# Altium PCB PCB1.PcbDoc
Units mil, origin at the board's own origin, x right, y up, seen from the top; angles counter-clockwise.
Board outline 1692.91 x 590.55 mil, 4 copper layers (Top Layer, Int1 (GND), Int2 (PWR), Bottom Layer), stack 19.827 mil thick; 78 components, 47 nets, 235 pads, 385 vias.
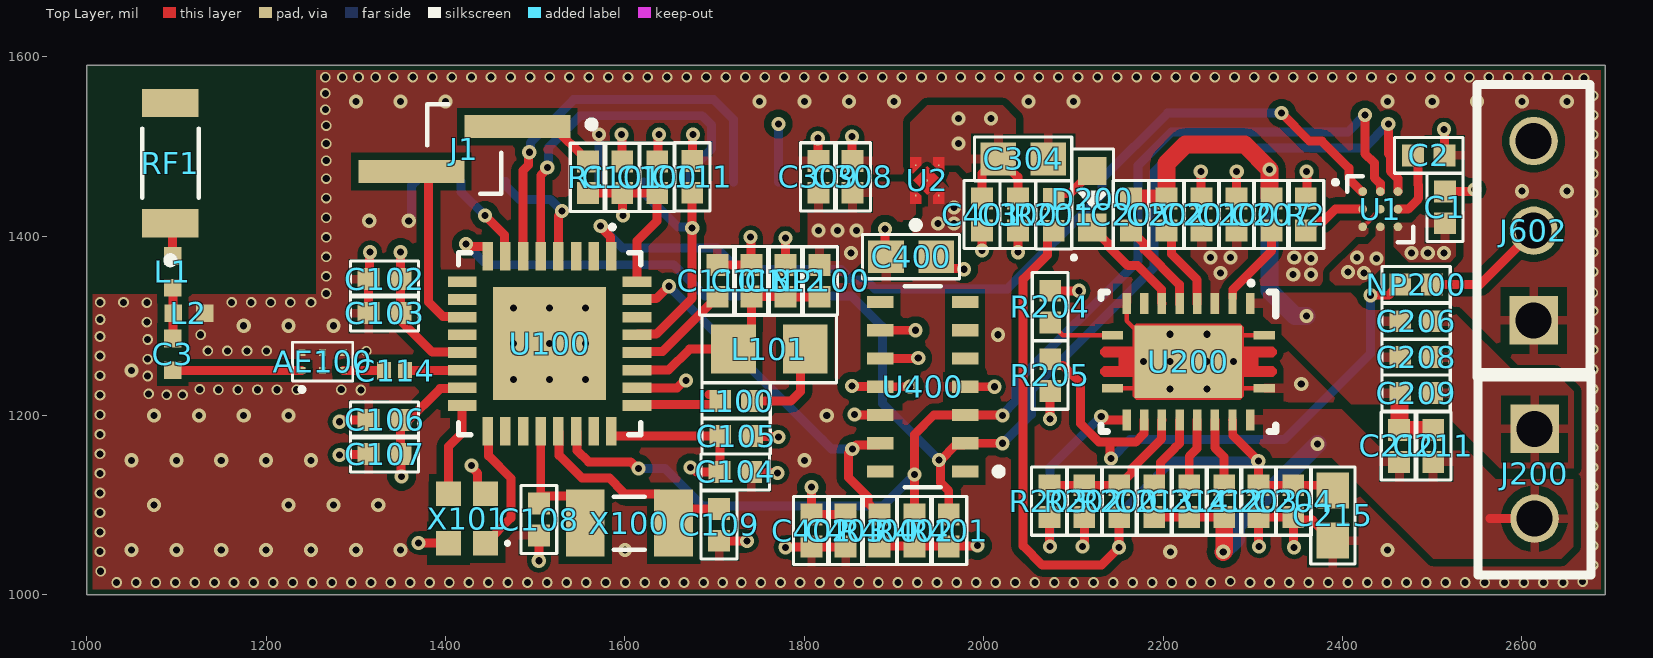
[diagram p0: Top Layer view]
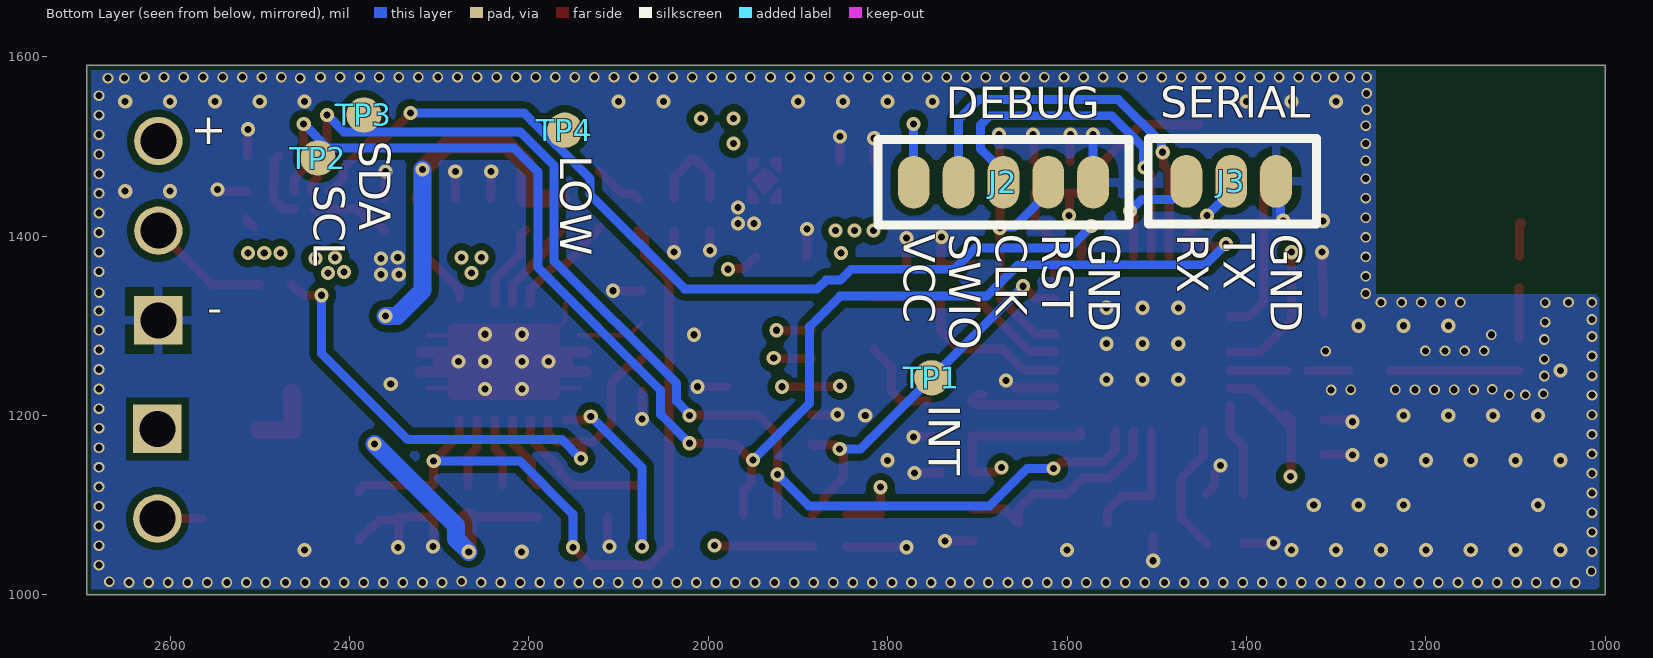
[diagram p1: Bottom Layer view, seen from below]
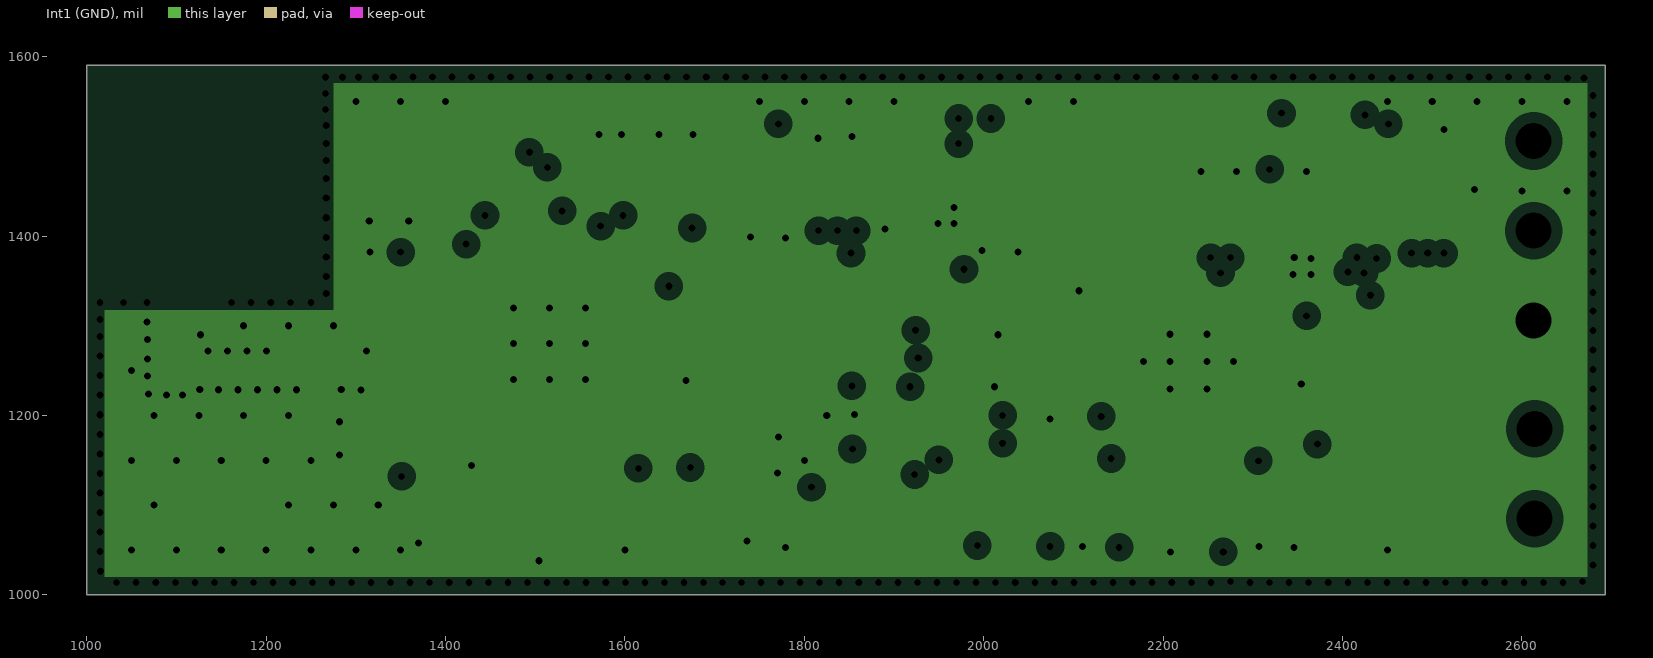
[diagram p2: Int1 (GND), clearances drawn from the general rule]
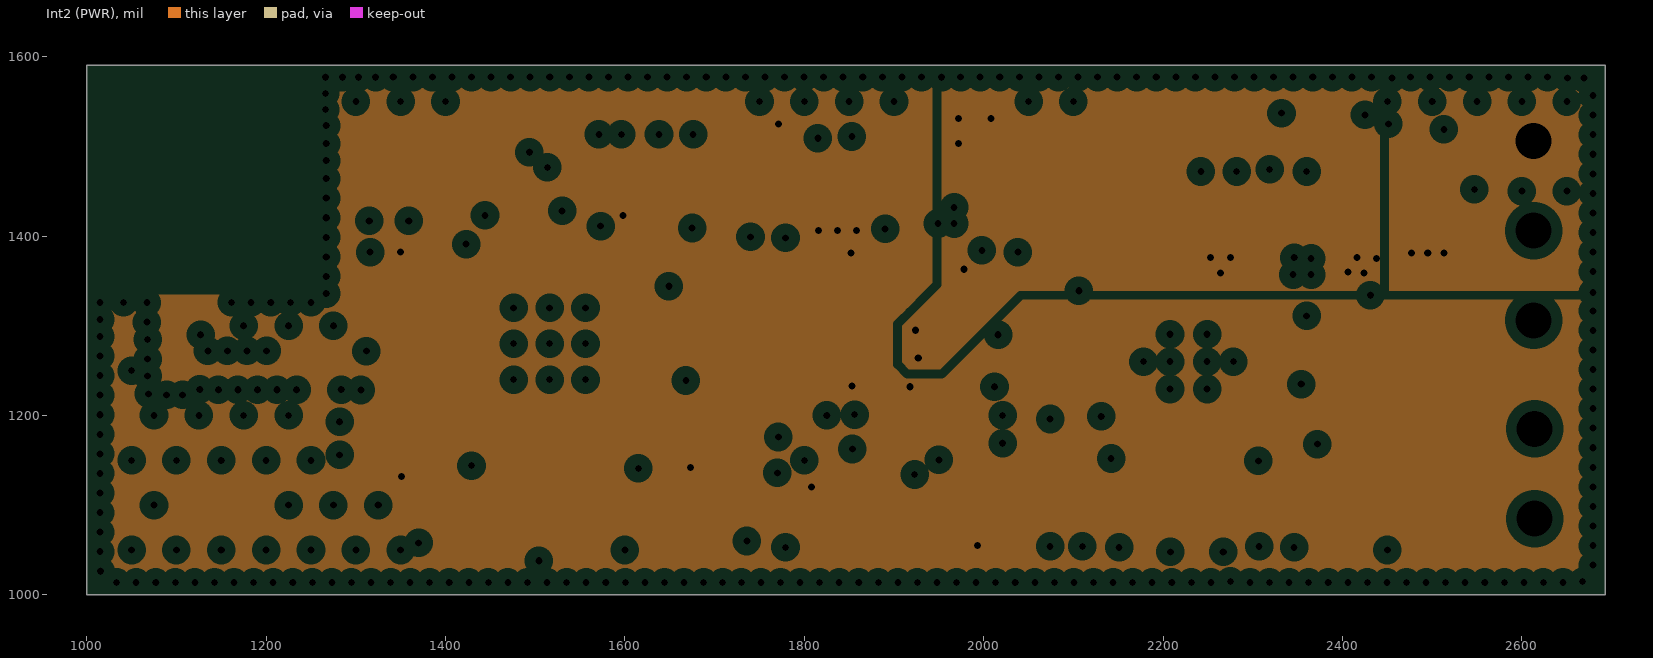
[diagram p3: Int2 (PWR), clearances drawn from the general rule]
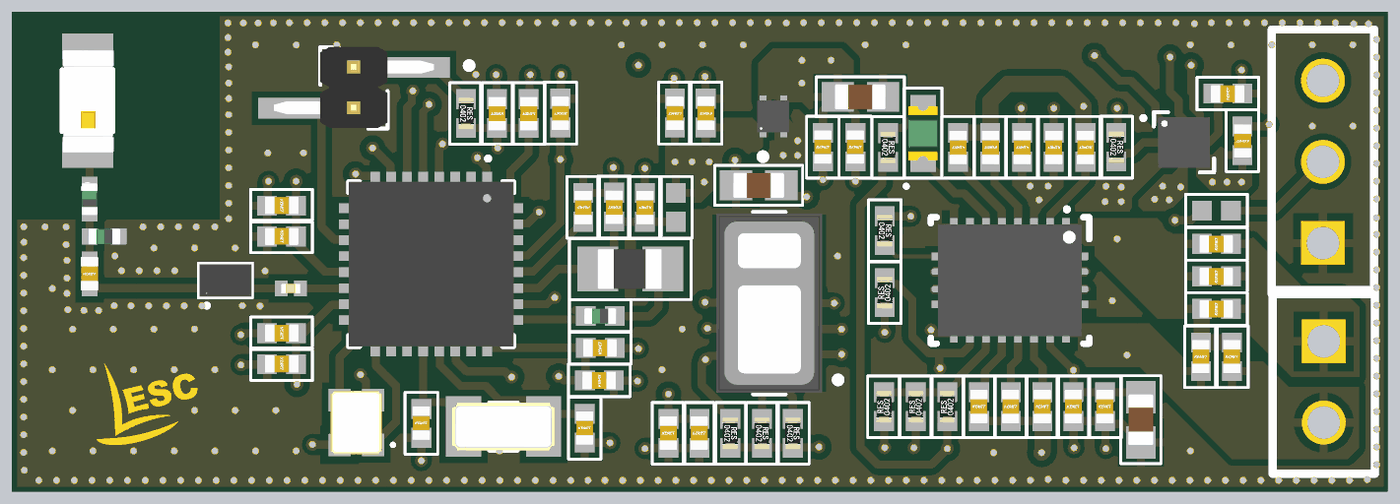
[diagram p4: 3D render of the assembled board from above, using the file's embedded part models]

## Layer stack, top to bottom
Top Solder: solder mask 1, SM-001, Dk 4
Top Layer: signal copper 1.378
Dielectric 2: prepreg 3, PP-007, Dk 4.2
Int1 (GND): plane copper 1.378, net GND
Dielectric 3: core 8.315, Core-039, Dk 4.8
Int2 (PWR): plane copper 1.378, net (Multiple Nets)
Dielectric 4: prepreg 3, PP-007, Dk 4.2
Bottom Layer: signal copper 1.378
Bottom Solder: solder mask 1, SM-001, Dk 4

## Board outline
1000,1000 1000,1590.55 2692.91,1590.55 2692.91,1000

## Design rules (kind name [scope] priority, off if disabled: settings)
Clearance Clearance_1 [WithinRoom('BGA') or WithinRoom('LDO')] p1: gap=5 ignorepadtopadclearanceinfootprint=FALSE
Clearance [All] p2: gap=7.87 ignorepadtopadclearanceinfootprint=FALSE
ComponentClearance [All] p1: gap=7.87 collisioncheckmode=3 verticalgap=7.87 showdistances=FALSE
PlaneClearance [All] p1: clearance=12
PlaneConnect [All] p1: pad.planeconnectstyle=Relief pad.reliefexpansion=20 pad.reliefentries=4 pad.reliefconductorwidth=10 pad.reliefairgap=10 via.planeconnectstyle=Direct via.reliefexpansion=20 via.reliefentries=4 via.reliefconductorwidth=10 via.reliefairgap=10
PolygonConnect [All] p1: thpad.connectstyle=Relief thpad.reliefconductorwidth=10 thpad.reliefentries=4 thpad.polygonreliefangle="90 Angle" thpad.airgapwidth=10 smdpad.connectstyle=Relief smdpad.reliefconductorwidth=10 smdpad.reliefentries=4 smdpad.polygonreliefangle="90 Angle" smdpad.airgapwidth=10 via.connectstyle=Direct via.reliefconductorwidth=10 via.reliefentries=4 via.polygonreliefangle="90 Angle" via.airgapwidth=10
RoomDefinition LDO [False] p1: confinementstyle=ConfineIn formatcopy=TRUE lockcomponents=FALSE outline 1918.1,1436.02 1918.1,1487.98 1955.9,1487.98 1955.9,1436.02
RoomDefinition BGA [False] p2: confinementstyle=ConfineIn formatcopy=TRUE lockcomponents=FALSE outline 2475,1398 2475,1464 2407,1464 2407,1398
RoutingVias [All] p1: holewidth=15.75 width=23.62 viastyle="Through Hole" minholewidth=7.87 minwidth=15.75 maxholewidth=19.68 maxwidth=27.56
SolderMaskExpansion SolderMaskExpansion_1 [ViaSize>0] p1: expansion=4 istentingtop=TRUE
SolderMaskExpansion [All] p2: expansion=0 istentingtop=FALSE
SupplyNets "Schematic Supply Nets_4" [InNet('VBAT')] p1: voltage=0.000
SupplyNets "Schematic Supply Nets_3" [InNet('VSYS')] p2: voltage=0.000
SupplyNets "Schematic Supply Nets_1" [InNet('1V8')] p3: voltage=0.000
SupplyNets "Schematic Supply Nets" [InNet('GND')] p4: voltage=0.000
Width [All] p1: maxlimit=20 minlimit=5 preferedwidth=10 minimp=50.000000 maximp=50.000000 favimp=50.000000
27 further rules are at their usual default settings.

## Classes and differential pairs
component class "05 - CONNECTOR": J2 J3 J602
component class "04 - OXIMETER": C400 C401 C402 C403 R400 R401 R402 TP1 TP2 TP3 U400
component class "03 - POWER SUPLY": C1 C2 C300 C304 C308 C309 R2 TP4 U1 U2
component class "02 - WIRELESS_CHARGE": C200 C201 C202 C203 C204 C205 C206 C207 C208 C209 C210 C211 C212 C213 C214 C215 D200 J200 NP200 R200 R201 R202 R203 R204 R205 U200
component class "01 - MCU": AE100 C3 C100 C101 C102 C103 C104 C105 C106 C107 C108 C109 C110 C111 C112 C113 C114 J1 L1 L2 L100 L101 NP100 R1 RF1 U100 X100 X101

## Components (designator, comment, footprint, x,y, rotation, side; value= is the part's Value field where it differs from the comment)
AE100 "RF FILTER LOW PASS 2.45GHZ 6SMD" MLPF-WB55-01E3_STM 1263,1260 r90 top
C1 "GRM155R61E105KA12D" 0402-C-R 2514.11,1431.96 r270 top value=1uF
C2 "GRM155R61A475MEAAD" 0402-C-R 2496.11,1489.96 r180 top value=4.7uF
C3 "GJM1555C1HR90WB01D" 0402-C-R-RF 1096,1268 r90 top value=1pF
C100 "C0402C104K8RACTU" 0402-C-R 1636,1465.49 r270 top value=100nF
C101 "GRM155R61E105KA12D" 0402-C-R 1597,1465.49 r270 top value=1uF
C102 "C0402C104K8RACTU" 0402-C-R 1332,1352 r0 top value=3pF
C103 "C0402C104K8RACTU" 0402-C-R 1332,1314 r0 top value=100nF
C104 "C0402C104K8RACTU" 0402-C-R 1723,1137 r180 top value=100nF
C105 "GRM155R61A475MEAAD" 0402-C-R 1724,1177 r180 top value=4.7uF
C106 "C0402C104K8RACTU" 0402-C-R 1332,1195 r0 top value=3pF
C107 "C0402C104K8RACTU" 0402-C-R 1332,1157 r0 top value=100nF
C108 "GCM1555C1H120FA16J" 0402-C-R 1504,1084 r90 top value=12pF
C109 "GCM1555C1H120FA16J" 0402-C-R 1705,1078 r90 top value=12pF
C110 "C0402C104K8RACTU" 0402-C-R 1703,1350 r270 top value=0.22uF
C111 "C0402C104K8RACTU" 0402-C-R 1675,1466 r270 top value=100nF
C112 "C0402C104K8RACTU" 0402-C-R 1779,1350 r270 top value=100nF
C113 "GRM155R61A475MEAAD" 0402-C-R 1741,1350.2 r270 top value=4.7uF
C114 "C0402C104K8RACTU" 0201-C-R-RF 1355,1250 r90 top value=20pF
C200 "C0402C104K8RACTU" 0402-C-R 2281.9,1423.96 r270 top value=100nF
C201 "GRM155R61A475MEAAD" 0402-C-R 2242.9,1423.96 r270 top value=4.7uF
C202 "GRM155R61H474KE11D" 0402-C-R 2203.9,1423.96 r270 top value=0.47uF
C203 "GCM155R71H223KA55D" 0402-C-R 2306.11,1104.47 r90 top value=0.022uF
C204 "GRM155R61A475MEAAD" 0402-C-R 2345.11,1104.47 r90 top value=4.7uF
C205 "GCM155R71H223KA55D" 0402-C-R 2164.11,1423.96 r270 top value=0.022uF
C206 "GCM155R71H683KE02D" 0402-C-R 2482.11,1304.96 r180 top value=0.068uF
C207 "GCM155R71H103KA55D" 0402-C-R 2320.9,1423.96 r270 top value=10000pF
C208 "GCM155R71H683KE02D" 0402-C-R 2482.11,1264.96 r180 top value=0.068uF
C209 "GCM155R71H473KE02D" 0402-C-R 2482.11,1224.96 r180 top value=0.047uF
C210 "GRM1555C1H182JA01D" 0402-C-R 2463.11,1165.96 r90 top value=1800pF
C211 "GRM1555C1H101JA01D" 0402-C-R 2501.11,1165.96 r90 top value=100pF
C212 "GCM155R71H103KA55D" 0402-C-R 2268.11,1104.47 r90 top value=10000pF
C213 "GCM155R71H223KA55D" 0402-C-R 2190.11,1104.47 r90 top value=0.022uF
C214 "GRM155R61H474KE11D" 0402-C-R 2229.11,1104.47 r90 top value=0.47uF
C215 "CAP SMD 0603 10uF 10V ±10%" 0603-C-R 2389.11,1088.47 r90 top value=10uF
C300 "C0402C104K8RACTU" 0402-C-R 2038,1424 r90 top value=100nF
C304 "CAP SMD 0603 10uF 10V ±10%" 0603-C-R 2044,1486 r180 top value=10uF
C308 "GRM155R61E105KA12D" 0402-C-R 1853.8,1466 r270 top value=1uF
C309 "C0402C104K8RACTU" 0402-C-R 1815.8,1466 r270 top value=100nF
C400 "CAP SMD 0603 10uF 10V ±10%" 0603-C-R 1919,1377 r0 top value=10uF
C401 "C0402C104K8RACTU" 0402-C-R 1998,1424 r90 top value=100nF
C402 "GRM155R61A475MEAAD" 0402-C-R 1808,1071.72 r90 top value=4.7uF
C403 "C0402C104K8RACTU" 0402-C-R 1846,1071.72 r90 top value=100nF
D200 "150060GS75000" LED0603 2121.11,1440.96 r90 top
J1 "CONN HEADER SMD 2POS 1.27MM" HARWIN_M50-3630242 1421,1497 r270 top
J2 "CONN PCB 5PIN" "SWD CONNECTOR" 1771,1460 r180 bottom
J3 "CONN PCB 3PIN" "DEBUG CONNECTOR" 1467,1461 r180 bottom
J200 "CONN COIL" "CONNECTOR COIL" 2614.11,1184.96 r270 top
J602 "10114830-11103LF" "CONNECTOR BATTERY" 2613.11,1305.96 r90 top
L1 "IND 3.9NH 300MA 170MOHM SM_1" "0402-R-L -RF" 1095.87,1360 r90 top value=3.9nH
L2 "IND 2.7NH 300MA 170MOHM SM" "0402-R-L -RF" 1114,1314 r180 top value=2.7nH
L100 "IND 22NH 350MA 0.58OHM SMD" 0402-R-L 1724,1216 r180 top
L101 "IND 10UH 300MA 680MOHM SMD" 0805-R-L 1761,1274 r0 top
NP100 "NP" 0402-R-NP 1817,1350 r90 top
NP200 "NP" 0402-R-NP 2482.11,1345.96 r0 top
R1 "RMCF0402FT10K0" 0402-R-R 1559,1465.49 r270 top value=10K
R2 "RMCF0402FT20K0" 0402-R-R 2359,1424 r270 top value=20K
R200 "RMCF0402FT20K0" 0402-R-R 2151.11,1104.47 r90 top value=20K
R201 "RMCF0402FT10K0" 0402-R-R 2078.11,1423.68 r270 top value=10K
R202 "RMCF0402JT200R" 0402-R-R 2112.11,1104.47 r90 top value=200R
R203 "RMCF0402FT422R" 0402-R-R 2073.11,1104.47 r90 top value=422R
R204 "RMCF0402FT2K43" 0402-R-R 2074.11,1321.25 r270 top value=2.43K
R205 "RMCF0402FT10K0" 0402-R-R 2074.11,1244.96 r90 top value=10K
R400 "RMCF0402FT1K00" 0402-R-R 1884,1071.72 r270 top value=1K
R401 "RMCF0402FT1K00" 0402-R-R 1961,1071.72 r270 top value=1K
R402 "RMCF0402FT1K00" 0402-R-R 1923,1071.72 r270 top value=1K
RF1 "RF ANT 2.4GHZ CHIP SOLDER SMD" XCVR_2450AT18A0100001E 1093.22,1481.32 r90 top
TP1 "TEST POINT SMD" "TP SMD" 1751,1242 r90 bottom
TP2 "TEST POINT SMD" "TP SMD" 2435,1487 r90 bottom
TP3 "TEST POINT SMD" "TP SMD" 2384,1535 r90 bottom
TP4 "TEST POINT SMD" "TP SMD" 2160,1518 r90 bottom
U1 "IC SINGLE-CELL BATTERY FUEL GAUGE W" IC_BQ27427YZFR 2442.11,1429.96 r0 top locked
U2 "IC REG LINEAR 1.8V 200MA 4-X2SON" IC_TPS7A0218PDQNR 1937,1462 r90 top
U100 "IC ULTRA-LOW-POWER, ARM CORTEX-M0+" VFQFPN-32_5x5x1mm_STM 1516,1280 r270 top locked
U200 "BQ51050BRHLR" RHL0020A 2228.11,1259.96 r270 top locked
U400 "IC SENSOR OXIMETER/HEART RATE I2C" XDCR_MAX30101EFD+ 1932,1232 r180 top
X100 "ECX-.327-CDX-1293" XTAL_ECS-.327-12.5-34RR-TR 1605,1080 r0 top value=32.768kHz
X101 "ECS-320-8-37-CKM-TR3" XTAL_ECS-320-8-37-CKM-TR3 1424,1085 r90 top

## Footprints (in the part's own frame and the unit in brackets; to place one, negate y for a bottom-side part, rotate by r counter-clockwise, add the part's x,y. Pads: shape width x height; smd on the part's side, far side on the other; paste and mask are expansions set on the pad)
0201-C-R-RF [mm]
  rect 0.5x0.4 smd: 1(0,0) 2(0,0.6)
  body extent -0.15,0 0.15,0.6, height 0.3
0402-C-R [mm]
  rect 0.62x0.62 smd: 1(-0.45,0) 2(0.45,0)
  silkscreen extent -0.97,-0.51 0.97,0.51, body extent -0.52,-0.27 0.53,0.28, height 0.55
0402-C-R-RF [mm]
  rect 0.5x0.5 smd: 1(-0.45,0) 2(0.45,0)
  body extent -0.52,-0.27 0.53,0.28, height 0.55
0402-R-L [mm]
  rect 0.62x0.62 smd: 1(-0.45,0) 2(0.45,0)
  silkscreen extent -0.97,-0.51 0.97,0.51, body extent -0.5,-0.25 0.5,0.25, height 0.55
"0402-R-L -RF" [mm]
  rect 0.5x0.5 smd: 1(-0.45,0) 2(0.45,0)
  body extent -0.5,-0.25 0.5,0.25, height 0.55
0402-R-NP [mm]
  rect 0.62x0.62 smd: 1(-0.45,0) 2(0.45,0)
  silkscreen extent -0.97,-0.51 0.97,0.51
0402-R-R [mm]
  rect 0.62x0.62 smd: 1(-0.45,0) 2(0.45,0)
  silkscreen extent -0.97,-0.51 0.97,0.51, body extent -0.5,-0.25 0.5,0.25, height 0.35
0603-C-R [mm]
  rect 1.01x0.93 smd: 1(-0.709,0) 2(0.709,0)
  silkscreen extent -1.38,-0.63 1.38,0.63, body extent -0.8,-0.4 0.8,0.4, height 1
0805-R-L [mil]
  rect 50x55 smd: 1(-40,0) 2(40,0)
  silkscreen extent -75,-38 75,38, body extent -40,-25 39,25, height 49
"CONNECTOR BATTERY" [mm]
  rect 1.37x1.37 hole 1.02: 1(0,0)
  round 1.37 hole 1.02: 2(2.54,0) 3(5.08,0)
  silkscreen extent -1.6,-1.6 6.68,1.6
"CONNECTOR COIL" [mm]
  rect 1.37x1.37 hole 1.02: 1(0,0)
  round 1.37 hole 1.02: 2(2.54,0)
  silkscreen extent -1.6,-1.6 4.14,1.6
"DEBUG CONNECTOR" [mm]
  oval 0.9x1.5 smd: 1(0,0) 2(1.27,0) 3(2.54,0)
  silkscreen extent -1.08,-1.21 3.68,1.21
HARWIN_M50-3630242 [mm]
  rect 0.65x3 smd: 1(-0.635,1.5) 2(0.635,-1.5)
  silkscreen extent -1.27,-1.05 1.27,3.7, body extent -1.29,-2.5 1.25,2.5, height 4.5
IC_BQ27427YZFR [mm]
  round 0.245 smd: A1(-0.5,0.5) A2(0,0.5) A3(0.5,0.5) B1(-0.5,0) B2(0,0) B3(0.5,0) C1(-0.5,-0.5) C2(0,-0.5) C3(0.5,-0.5)
  silkscreen extent -1.33,-0.94 0.94,0.94, body extent -0.81,-0.79 0.81,0.79, height 0.63
IC_TPS7A0218PDQNR [mm]
  rect 0.05x0.05 smd paste-1 mask+0: 1(-0.43,0.325) 2(-0.43,-0.325) 3(0.43,-0.325) 4(0.43,0.325) 5(0,0)
  Top Layer region: -0.2,0.4 -0.43,0.17 -0.66,0.17 -0.66,0.48 -0.2,0.48
  Top Layer region: 0.66,-0.48 0.2,-0.48 0.2,-0.4 0.43,-0.17 0.66,-0.17
  Top Layer region: 0.66,0.17 0.43,0.17 0.2,0.4 0.2,0.48 0.66,0.48
  Top Layer region: -0.2,-0.4 -0.2,-0.48 -0.66,-0.48 -0.66,-0.17 -0.43,-0.17
  Top Layer region: 0.4,0 0,-0.4 -0.4,0 0,0.4
  silkscreen extent -1.36,0.23 -1.16,0.42, body extent -0.5,-0.5 0.5,0.5, height 0.4
LED0603 [mm]
  rect 0.8x0.8 smd: 1(-0.8,0) 2(0.8,0)
  silkscreen extent -1.7,-0.59 1.42,0.59, body extent -0.85,-0.45 0.85,0.45, height 0.9
MLPF-WB55-01E3_STM [mil]
  rect 8x8 smd paste+0 mask+0: 1(-10,23.11) 2(-10,0) 3(-10,-23.11) 4(10,-23.11) 5(10,0) 6(10,23.11)
  silkscreen extent -33,-34 21,34, body extent -20,-32 20,32, height 18
RHL0020A [mm]
  rect 0.24x0.6 smd paste+0: 1(-0.75,2.15) 10(-0.75,-2.15) 11(0.75,-2.15) 20(0.75,2.15)
  rect 0.6x0.24 smd paste+0: 2(-1.65,1.75) 3(-1.65,1.25) 4(-1.65,0.75) 5(-1.65,0.25) 6(-1.65,-0.25) 7(-1.65,-0.75) 8(-1.65,-1.25) 9(-1.65,-1.75) 12(1.65,-1.75) 13(1.65,-1.25) 14(1.65,-0.75) 15(1.65,-0.25) 16(1.65,0.25) 17(1.65,0.75) 18(1.65,1.25) 19(1.65,1.75)
  rect 2.05x3.05 smd paste-1.512 mask+0: 21(0,0)
  Top Layer region: -1.075,-1.475 -0.975,-1.575 -0.425,-1.575 -0.425,-2.4 -0.325,-2.5 -0.225,-2.5 -0.125,-2.4 -0.125,-1.975 0.125,-1.975 0.125,-2.4 0.225,-2.5 0.325,-2.5 0.425,-2.4 0.425,-1.575 0.975,-1.575 1.075,-1.475 1.075,1.475 0.975,1.575 0.425,1.575 0.425,2.4 0.325,2.5 0.225,2.5 0.125,2.4 0.125,1.975 -0.125,1.975 -0.125,2.4 -0.225,2.5 -0.325,2.5 -0.425,2.4 -0.425,1.575 -0.975,1.575 -1.075,1.475
  silkscreen extent -2.29,-2.47 1.98,2.47, body extent -1.75,-2.25 1.75,2.25, height 1
"SWD CONNECTOR" [mm]
  oval 0.9x1.5 smd: 1(0,0) 2(1.27,0) 3(2.54,0) 4(3.81,0) 5(5.08,0)
  silkscreen extent -1.02,-1.21 6.1,1.21
"TP SMD" [mm]
  round 1 smd: 1(0,0)
VFQFPN-32_5x5x1mm_STM [mil]
  rect 32x11.81 smd: 1(-97.5,68.9) 2(-97.5,49.21) 3(-97.5,29.53) 4(-97.5,9.84) 5(-97.5,-9.84) 6(-97.5,-29.53) 7(-97.5,-49.21) 8(-97.5,-68.9) 17(97.5,-68.9) 18(97.5,-49.21) 19(97.5,-29.53) 20(97.5,-9.84) 21(97.5,9.84) 22(97.5,29.53) 23(97.5,49.21) 24(97.5,68.9)
  rect 11.81x32 smd: 9(-68.9,-97.5) 10(-49.21,-97.5) 11(-29.53,-97.5) 12(-9.84,-97.5) 13(9.84,-97.5) 14(29.53,-97.5) 15(49.21,-97.5) 16(68.9,-97.5) 25(68.9,97.5) 26(49.21,97.5) 27(29.53,97.5) 28(9.84,97.5) 29(-9.84,97.5) 30(-29.53,97.5) 31(-49.21,97.5) 32(-68.9,97.5)
  rect 126x126 smd paste-18.45: 33(0,0)
  silkscreen extent -132,-102 102,102, body extent -101,-101 101,101, height 39
XCVR_2450AT18A0100001E [mm]
  rect 0.8x1.6 smd: 1(-1.7,0) 2(1.7,0)
  silkscreen extent -2.85,-0.8 0.98,0.8, body extent -1.62,-0.82 1.58,0.78, height 1.4
XDCR_MAX30101EFD+ [mm]
  rect 0.75x0.35 smd: 1(-1.2,2.4) 2(-1.2,1.6) 3(-1.2,0.8) 4(-1.2,0) 5(-1.2,-0.8) 6(-1.2,-1.6) 7(-1.2,-2.4) 8(1.2,-2.4) 9(1.2,-1.6) 10(1.2,-0.8) 11(1.2,0) 12(1.2,0.8) 13(1.2,1.6) 14(1.2,2.4)
  silkscreen extent -2.25,-2.85 0.51,2.85, body extent -1.65,-2.8 1.65,2.8, height 1.65
XTAL_ECS-320-8-37-CKM-TR3 [mm]
  rect 0.7x0.7 smd: 1(-0.7,-0.525) 2(0.7,-0.525) 3(0.7,0.525) 4(-0.7,0.525)
  silkscreen extent -0.75,-1.19 -0.65,-1.09, body extent -1,-0.8 1,0.8, height 0.55
XTAL_ECS-.327-12.5-34RR-TR [mm]
  rect 1.1x1.9 smd: 1(-1.25,0) 2(1.25,0)
  silkscreen extent -0.44,-0.75 0.44,0.75, body extent -1.6,-0.75 1.6,0.75, height 0.9

## Part data
AE100: "2.45GHz Center Frequency Low Pass RF Filter (Radio Frequency) 100MHz Bandwidth 1.1dB 6-SMD, No Lead PN: MLPF-WB55-01E3", Mfr_Name=STMicroelectronics, PN=MLPF-WB55-01E3, RefDes=RefDes, Type=Type
C1 C101 C308: library part "CAP SMD 0402 1uF 25V ±10%", "CAP SMD 0402 MLCC GERAL 1uF 25V ±10% 0402 X5R PN:GRM155R61E105KA12D MURATA", Tolerance=10%, Voltage=25V, PN=GRM155R61E105KA12D, SIZE=0402
C2 C105 C113 C201 C204 C402: library part "CAP SMD 0402 4.7uF 10V ±20%", "CAP SMD 0402 MLCC GERAL 4.7uF 10V ±20% 0402 X5R PN:GRM155R61A475MEAAD MURATA", Tolerance=20%, Voltage=10V, PN=GRM155R61A475MEAAD, SIZE=0402
C3: library part "CAP SMD 1PF 50V C0G/NP0 0402", "CAP CER 1PF 50V C0G/NP0 0402 PN: QSCF500Q1R0B1GV001T", Tolerance=20%, Voltage=50V, PN=QSCF500Q1R0B1GV001T, SIZE=0402
C100 C103 C104 C107 C111 C112 C200 C300 C309 C401 C403: library part "CAP SMD 0402 100nF 10V ±20%", "CAP SMD 0402 MLCC GERAL 100nF 10V ±20% 0402 X7R PN:C0402C104K8RACTU KEMET", Tolerance=20%, Voltage=10V, PN=C0402C104K8RACTU, SIZE=0402
C102 C106: library part "CAP SMD 0402 3pF 50V ±0.1pF", "CAP CER 3PF 50V C0G/NP0 0402 PN: 0402N3R0B500CT", Tolerance=±0.1pF, Voltage=50V, PN=0402N3R0B500CT, SIZE=0402
C108 C109: library part "CAP SMD 0402 12pF 50V ±1%", "CAP SMD CER 12pF 50V ±1% 0402 C0G,NP0 TAPE PN: GCM1555C1H120FA16J", POWER=50V, Tolerance=1%, PN=GCM1555C1H120FA16J
C110: library part "CAP SMD 0402 0.22uF 6.3V ±10%", "CAP SMD 0402 MLCC GERAL 0.22u 6.3V ±10% 0402 X5R PN: CC0402KRX5R5BB224", Tolerance=10%, Voltage=6.3V, PN=CC0402KRX5R5BB224, SIZE=0402
C114: library part "CAP SMD 0201 20pF 25V ±2%", "20 pF ±2% 25V Ceramic Capacitor C0G, NP0 0201 PN: GJM0335C1E200GB01D", Tolerance=2%, Voltage=25V, PN=GJM0335C1E200GB01D, SIZE=0201
C202 C214: library part "CAP SMD 0402 0.47uF 50V ±10%", "CAP CER  0.47uF 50V X7R 0402 PN: GRM155R61H474KE11D", POWER=50V, Tolerance=10%, PN=GRM155R61H474KE11D
C203 C205 C213: library part "CAP SMD 0402 0.022uF 50V ±10%", "CAP CER  0.022uF 50V X7R 0402 PN: GCM155R71H223KA55D", POWER=50V, Tolerance=10%, PN=GCM155R71H223KA55D
C206 C208: library part "CAP SMD 0402 0.068uF 50V ±10%", "CAP CER 0.068uF 50V X7R 0402 PN: GCM155R71H683KE02D", POWER=50V, Tolerance=10%, PN=GCM155R71H683KE02D
C207 C212: library part "CAP SMD 0402 10000pF 50V ±10%", "CAP CER 10000PF 50V X7R 0402 PN: GCM155R71H103KA55D", POWER=50V, Tolerance=10%, PN=GCM155R71H103KA55D
C209: library part "CAP SMD 0402 0.047uF 50V ±10%", "CAP CER  0.047uF 50V X7R 0402 PN: GCM155R71H473KE02D", POWER=50V, Tolerance=10%, PN=GCM155R71H473KE02D
C210: library part "CAP SMD 0402 1800pF 50V ±5%", "CAP CER 1800PF 50V C0G/NP0 0402 PN: GRM1555C1H182JA01D", POWER=50V, Tolerance=5%, PN=GRM1555C1H182JA01D
C211: library part "CAP SMD 0402 100pF 50V ±5%", "CAP SMD CER 100pF 50V ±5% 0402 C0G,NP0 TAPE PN: GRM1555C1H101JA01D", POWER=50V, Tolerance=1%, PN=GRM1555C1H101JA01D
C215 C304 C400: "CAP SMD 0603 MLCC GERAL 10uF 10V ±10% X7R PN: GRM188Z71A106KA73D", Tolerance=10%, Voltage=10V, PN=GRM188Z71A106KA73D, SIZE=0603
D200: library part "LED SMD VD 0603", "LED SMD VD ALTO BRILHO 1,6x0,8x0,8mm 430mcd PN:150060GS75000 0603 WURTH", ID=?, PN=150060GS75000
J1: "Connector Header Surface Mount 2 position 0.050\" (1.27mm) PN: M50-3630242", Package=None, Availability=Unavailable, MF="{'manufacturer': u'Harwin Inc.'}", PN=M50-3630242, Price=None
J200: "COIL CONNECTOR"
J602: library part "CONN HEADER SMD R/A 3POS 1.25MM", "CONN HEADER SMD R/A 3POS 1.25MM", Manufacturer="Amphenol ICC", eVendor=Digikey, eVendor Part#=609-10114830-11103LFCT-ND, eVendor Price=0,48, MOQ=500, MSRP=0,27254, PN=10114830-11103LF
L1: "IND 3.9NH 300MA 170MOHM SM PN: LRC0402CS3N9GV001T", Package="1608 ICS", DigiKey-Purchase-URL=https://snapeda.com/shop?store=DigiKey&id=4221634, MF="Murata Electronics", Mouser-Purchase-URL=https://snapeda.com/shop?store=Mouser&id=4221634, PN=LRC0402CS3N9GV001T, SnapEDA_Link=https://www.snapeda.com/parts/DFE18SAN1R0ME0L/Applied%20Avionics/view-part/4221634/?ref=snap
L2: "IND 2.7NH 300MA 170MOHM SM PN: LRC0402CS2N7GV001T", Package="1608 ICS", DigiKey-Purchase-URL=https://snapeda.com/shop?store=DigiKey&id=4221634, MF="Murata Electronics", Mouser-Purchase-URL=https://snapeda.com/shop?store=Mouser&id=4221634, PN=LRC0402CS2N7GV001T, SnapEDA_Link=https://www.snapeda.com/parts/DFE18SAN1R0ME0L/Applied%20Avionics/view-part/4221634/?ref=snap
L100: "IND 22NH 350MA 0.58OHM SMD PN: LQG15HN22NJ02D", Package="1608 ICS", Part Number=DFE18SAN1R0ME0L, DigiKey-Purchase-URL=https://snapeda.com/shop?store=DigiKey&id=4221634, IND=22nH, MF="Murata Electronics", Mouser-Purchase-URL=https://snapeda.com/shop?store=Mouser&id=4221634, PN=LQG15HN22NJ02D, SnapEDA_Link=https://www.snapeda.com/parts/DFE18SAN1R0ME0L/Applied%20Avionics/view-part/4221634/?ref=snap
L101: "FIXED IND 10UH 300MA 680MOHM SMDPN: MLZ2012M100HT000", Package="1608 ICS", Part Number=DFE18SAN1R0ME0L, DigiKey-Purchase-URL=https://snapeda.com/shop?store=DigiKey&id=4221634, IND=10uH, MF="Murata Electronics", Mouser-Purchase-URL=https://snapeda.com/shop?store=Mouser&id=4221634, PN=MLZ2012M100HT000, SnapEDA_Link=https://www.snapeda.com/parts/DFE18SAN1R0ME0L/Applied%20Avionics/view-part/4221634/?ref=snap
NP100 NP200: library part "RES SMD 0402 NP", "RES SMD 0402 NP", PACK=0402
R1 R201 R205: library part "RES SMD 0402 10K 0.063W ±1%", "RES SMD GERAL FILM 10K 0.063W ±1% 0402 7\" TAPE PN: RMCF0402FT10K0 STACKPOLE", POWER=0.063W, Tolerance=1%, PACK=0402, PN=RMCF0402FT10K0
R2 R200: library part "RES SMD 0402 20K 0.063W ±1%", "RES SMD GERAL FILM 20K 0.063W ±1% 0402 7\" TAPE PN: RMCF0402FT20K0 STACKPOLE", POWER=0.063W, Tolerance=1%, PACK=0402, PN=RMCF0402FT20K0
R202: library part "RES SMD 0402 200R 0.063W ±1%", "RES SMD GERAL FILM 200R 0.063W ±1% 0402 7\" TAPE PN: RMCF0402JT200R STACKPOLE", POWER=0.063W, Tolerance=1%, PACK=0402, PN=RMCF0402JT200R
R203: library part "RES SMD 0402 422R 0.063W ±1%", "RES SMD GERAL FILM 422R 0.063W ±1% 0402 7\" TAPE PN: RMCF0402FT422R STACKPOLE", POWER=0.063W, Tolerance=1%, PACK=0402, PN=RMCF0402FT422R
R204: library part "RES SMD 0402 2.43K 0.063W ±1%", "RES SMD GERAL FILM 2.43K 0.063W ±1% 0402 7\" TAPE PN: RMCF0402FT2K43 STACKPOLE", POWER=0.063W, Tolerance=1%, PACK=0402, PN=RMCF0402FT2K43
R400 R401 R402: library part "RES SMD 0402 1K 0.063W ±1%", "RES SMD GERAL FILM 1K 0.063W ±1% 0402 7\" TAPE PN: RMCF0402FT1K00 STACKPOLE", POWER=0.063W, Tolerance=1%, PACK=0402, PN=RMCF0402FT1K00
RF1: "2.4GHz Chip RF Antenna 2.4GHz ~ 2.5GHz 0.5dBi Solder Surface Mount PN: 2450AT18A0100001E", Package=None, Check_prices=https://www.snapeda.com/parts/2450AT18A0100001E/AN/view-part/?ref=eda, MF=Johanson, PN=2450AT18A0100001E, SnapEDA_Link=https://www.snapeda.com/parts/2450AT18A0100001E/AN/view-part/?ref=snap
U1: "Battery Fuel Gauge IC Lithium Ion 9-DSBGA PN: BQ27427YZFR", Package=None, Availability="In Stock", Check_prices=https://www.snapeda.com/parts/BQ27427YZFR/Texas+Instruments/view-part/?ref=eda, MF="Texas Instruments", PN=BQ27427YZFR, Price=None, Purchase-URL=https://pricing.snapeda.com/search/part/BQ27427YZFR/?ref=eda, SnapEDA_Link=https://www.snapeda.com/parts/BQ27427YZFR/Texas+Instruments/view-part/?ref=snap
U2: "Linear Voltage Regulator IC Positive Fixed 1 Output 200mA 4-X2SON (1x1) PN: TPS7A0218PDQNR", Package=None, Availability=Unavailable, MF="{'manufacturer': u'Texas Instruments'}", PN=TPS7A0218PDQNR, Price=None
U100: "IC RF TxRx + MCU Bluetooth Bluetooth v5.4 32-VFQFN PN: STM32WB09KEV6TR", Mfr_Name=STMicroelectronics, PN=STM32WB09KEV6TR, RefDes=RefDes, Type=Type
U200: library part "IC WIRELESS PWR RCVR 20QFN", "Wireless Power Receiver PMIC 20-VQFN (3.5x4.5) PN: BQ51050BRHLR", Mfr_Name="Texas Instruments", PN=BQ51050BRHLR, RefDes=RefDes, Type=TYPE
U400: "IC SENSOR OXIMETER/HEART RATE I2C PN: MAX30102EFD+T", Package=None, Check_prices=https://www.snapeda.com/parts/MAX30102EFD+T/Maxim+Integrated/view-part/?ref=eda, Digi-Key_Part_Number=MAX30102EFD+TTR-ND, MF="Maxim Integrated Products", PN=MAX30102EFD+T, Purchase-URL=https://pricing.snapeda.com/search/part/MAX30102EFD+T/?ref=eda, SnapEDA_Link=https://www.snapeda.com/parts/MAX30102EFD+T/Maxim+Integrated/view-part/?ref=snap
X100: library part "CRYSTAL 32.768kHZ 12.5pF  SMD", "CRYSTAL 32.768kHZ 12.5pF  SMD", Package="SMD-2 ECS International", Digi-Key_Part_Number=XC2292CT-ND, Digi-Key_Purchase_URL=https://www.digikey.in/product-detail/en/ecs-inc/ECX-.327-CDX-1293/XC2292CT-ND/6821660?utm_source=snapeda&utm_medium=aggregator&utm_campaign=symbol, MF="ECS Inc.", PN=ECX-.327-CDX-1293, SnapEDA_Link=https://www.snapeda.com/parts/ECX-.327-CDX-1293/ECS%20Inc./view-part/1733917/?ref=snap
X101: library part "CRYSTAL 32.0000MHZ 8PF SMD", "32 MHz ±10ppm Crystal 8pF 60 Ohms 4-SMD, No Lead PN: ECS-320-8-37-CKM-TR3", Package="SMD-4 Abracon LLC", Availability="In Stock", Check_prices=https://www.snapeda.com/parts/ABM12-48.000MHZ-B2X-T3/Abracon+LLC/view-part/?ref=eda, FRQ=32MHz, MF="Abracon LLC", PN=ECS-320-8-37-CKM-TR3, Price=None, Purchase-URL=https://pricing.snapeda.com/search/part/ABM12-48.000MHZ-B2X-T3/?ref=eda, SnapEDA_Link=https://www.snapeda.com/parts/ABM12-48.000MHZ-B2X-T3/Abracon+LLC/view-part/?ref=snap

## Via types
v1: diameter 11.81, hole 7.87, Top Layer to Bottom Layer, tented both sides, 222 vias
v2: diameter 15.75, hole 7.87, Top Layer to Bottom Layer, tented both sides, 163 vias

## Nets (pads, with @x,y where several pads share a name; then routed paths per layer and width w, separated by ;. In a path a pad name is that pad's centre, name@x,y a point inside that pad or via, vN(x,y) a via of type N, cw(c..) or ccw(c..) an arc to the next point about the centre after c; other vN are vias at no path point)
1V8: C100.2 C101.2 C102.2 C103.2 C104.2 C105.2 C106.2 C107.2 C308.2 C309.2 C402.2 C403.2 J2.1 NP100.2 R1.2 R400.2 R401.2 R402.2 U2.1 U100.13 U100.15 U100.24 U100.32 U400.11 | length 1032.3
  Top Layer w10: C107.2@1349.72,1156 C107.2 ; v2(1350,1382) 1349.86,1381.86 1349.86,1352.14 C102.2 C103.2 1349.72,1306.28 1385.36,1270.64 1418.5,1270.64 U100.13 ; v2(1351,1132) 1350.36,1132.64 1350.36,1156.36 C107.2 ; C106.2@1356.17,1192.17 1393.88,1229.88 1418.5,1229.88 U100.15 ; C106.2@1356.17,1201.45 C106.2 C107.2 ; R1.2 C101.2 ; U100.24 1584.9,1177.91 1585.8,1177 C105.2 1705.78,1176.5 1705.78,1137.5 C104.2 1679.56,1137 1674.56,1142 v2(1673,1142) ; v2(1598,1423) 1597.5,1423.5 1597.5,1447.27 C101.2 ; U100.32 1613.5,1394.5 1636,1417 C100.2 C101.2 ; v2(1808,1120) C402.2 C403.2 ; v2(1853,1233) 1853.5,1232.5 1884.26,1232.5 U400.11 v2(1918,1232) ; R400.2 1884.5,1054.5 1992.5,1054.5 v2(1993,1055)
  Bottom Layer w10: J2.1 v2(1771,1525)
  other v2: 1852,1381 1816,1406 1837,1406 1858,1406
BOOT: J1.2 U100.11 | length 192.2
  Top Layer w10: J1.2@1381,1474.2 1381,1326.6 1397.17,1310.43 1417.59,1310.43 U100.11
GND: AE100.2 AE100.4 AE100.5 AE100.6 C1.1 C2.1 C100.1 C101.1 C102.1 C103.1 C104.1 C105.1 C106.1 C107.1 C108.1 C109.1 C110.1 C111.1 C112.1 C113.1 C200.1 C201.1 C203.1 C204.1 C215.1 C300.1 C304.1 C308.1 C309.1 C400.1 C401.1 C402.1 C403.1 J2.5 J3.3 J602.1 L2.1 R2.1 R202.1 R204.1 R205.1 U1.B2 U1.C1 U2.2 U2.5 U100.26 U100.33 U200.1 U200.9 U200.11 U200.20 U200.21 U400.4 U400.12 X101.2 X101.4 | length 1763.4
  Top Layer w5: U200.11 2198.58,1230.43 U200.21 ; U200.9 2159.21,1305.61 2167.01,1297.82 2190.25,1297.82 U200.21 ; U200.20 2257.63,1230.43 U200.21 ; U200.1 2257.63,1289.49 U200.21 ; 2428.5,1416.15 U1.B2
  Top Layer w10: v2(1282,1156) 1282.5,1156.5 1313.78,1156.5 C107.1 ; v2(1282,1193) 1283.56,1193 1285.56,1195 C106.1 ; C102.1@1314.14,1352 1315.14,1353 1315.14,1381.14 v2(1316,1382) ; C103.1 C102.1 ; v2(1370,1058) 1370.28,1057.72 1403.05,1057.72 X101.4 ; v2(1429,1144) 1429,1142.44 1435.89,1135.55 1435.89,1121.34 X101.2 ; v2(1504,1038) C108.1 ; v2(1596,1513.38) 1596.5,1512.88 1596.5,1483.7 C101.1 ; U100.26 1658.23,1230.79 1666.44,1239 v2(1668,1239) ; C100.1 1637,1484.2 1637,1512.38 v2(1638,1513.38) ; C111.1 1675.5,1484.22 1675.5,1512.88 v2(1676,1513.38) ; C110.1 1703.1,1367.82 1740.9,1367.82 C113.1 1740.5,1368.42 1740.5,1398.5 v2(1740,1399) ; C109.1 1705.14,1060.14 1735.86,1060.14 v2(1736,1060) ; C104.1 1741.22,1136.5 1769.5,1136.5 v2(1770,1136) ; C105.1 1742.22,1176.5 1770.5,1176.5 v2(1771,1176) ; v2(1779,1053) 1779.5,1053.5 1845.5,1053.5 C403.1 ; C112.1 v2(1779,1398) ; v2(1815,1509) 1815.4,1508.6 1815.4,1484.11 C309.1 ; v2(1853,1511) 1853.4,1510.6 1853.4,1484.11 C308.1 ; v2(1856,1201) 1856.25,1200.75 1884.51,1200.75 U400.12 ; v2(1890,1408) 1890,1378.09 C400.1 ; U400.4 v2(2012,1232) ; v2(1998,1384) C401.1 ; v2(2038,1382) C300.1 ; v2(2074,1196) 2074.05,1196.05 R205.1 R205.1 ; R204.1 v2(2106,1339) ; v2(2110,1054) 2110,1055.56 2112.11,1057.66 R202.1 ; v2(2242,1472) 2242.45,1471.55 2242.45,1442.13 C201.1 ; C200.1 2281.95,1441.73 v2(2282,1472) v2(2282,1472) ; v2(2307,1054) 2306.55,1054.45 2306.55,1086.31 C203.1 C204.1@2338.9,1086.76 ; v2(2346,1053) 2345.55,1053.45 2345.55,1079.55 2345.65,1079.65 2346,1079.65 2342,1083.65 C204.1 2348.65,1083.21 2366.45,1083.21 2374.22,1075.44 2375.8,1075.44 2389.11,1062.13 C215.1 ; v2(2360,1472) 2360.55,1471.45 2360.55,1442.23 R2.1@2361.11,1441.68 ; v2(2513,1519) 2513.41,1518.59 2513.41,1490.37 C2.1 ; C1.1 2543.12,1449.68 2545.44,1452 v2(2547,1452)
  Bottom Layer w10: v2(1359,1417) 1359,1418.56 1362.13,1421.69 1362.13,1456.13 J3.3 ; J2.5 v2(1571,1513.38)
  other v1: 1033.36,1013.78 1055.17,1013.78 1076.99,1013.78 1098.8,1013.78 1120.61,1013.78 1142.42,1013.78 1164.23,1013.78 1186.04,1013.78 1207.85,1013.78 1229.66,1013.78 1251.47,1013.78 1273.28,1013.78 1295.1,1013.78 1316.91,1013.78 1338.72,1013.78 1360.53,1013.78 1382.34,1013.78 1404.15,1013.78 1425.96,1013.78 1447.77,1013.78 1469.58,1013.78 1491.39,1013.78 1513.21,1013.78 1535.02,1013.78 1556.83,1013.78 1578.64,1013.78 1600.45,1013.78 1622.26,1013.78 1644.07,1013.78 1665.88,1013.78 1687.69,1013.78 1709,1013.78 1729.79,1013.78 1751.6,1013.78 1773.41,1013.78 1795.22,1013.78 1817.03,1013.78 1838.85,1013.78 1860.66,1013.78 1882.47,1013.78 1904.28,1013.78 1926.09,1013.78 1947.9,1013.78 1969.71,1013.78 1991.52,1013.78 2013.33,1013.78 2035.14,1013.78 2056.96,1013.78 2078.77,1013.78 2100.58,1013.78 2122.39,1013.78 2144.2,1013.78 2166.01,1013.78 2187.82,1013.78 2209.63,1013.78 2231.44,1013.78 2253.25,1013.88 2296.81,1013.78 2318.62,1013.78 2340.43,1013.78 2362.24,1013.78 2384.06,1013.78 2405.87,1013.78 2427.68,1013.78 2449.49,1013.78 2471.3,1013.78 2493.11,1013.78 2514.92,1013.78 2536.73,1013.78 2558.54,1013.78 2580.35,1013.78 2602.17,1013.78 2623.98,1013.78 2645.79,1013.78 2275.04,1015.02 2667.58,1014.69 1015.51,1026.32 2679.22,1033.14 1014.78,1048.12 2679.22,1054.95 1014.78,1069.93 2679.22,1076.76 1014.78,1091.74 2679.22,1098.57 1014.78,1113.55 2679.22,1120.38 1014.78,1135.36 2679.22,1142.2 1014.78,1157.17 2679.22,1164.01 1014.78,1178.98 2679.22,1185.82 1014.78,1200.79 2679.22,1207.63 1014.78,1222.61 1089,1223 1107,1223 1069,1224 1305.57,1228.37 1126,1229 1146.74,1228.65 1168.56,1228.65 1190.37,1228.65 1212.18,1228.65 1233.99,1228.65 1283.76,1228.84 2679.22,1229.44 1014.78,1244.42 1068,1244 2679.22,1251.25 1068,1262.81 1014.78,1266.23 1135.07,1271.91 1156.89,1271.91 1178.7,1271.91 1200.51,1271.91 1311.82,1271.63 2679.22,1273.06 1068,1284.62 1014.78,1288.04 1127,1290 2679.22,1294.87 1067,1304 1015,1307 2679.22,1316.68 1015,1326 1041,1326 1067,1325.81 1161.57,1326 1183.38,1326 1205.19,1326 1227,1326 1250,1326 1267,1336 2679,1337 1267,1355 2679.22,1360.31 1267,1376.81 2679.22,1382.12 1267,1398.62 2679.22,1403.93 1267,1420.43 2679.22,1425.74 1267,1442.24 2679.22,1447.55 1267,1464.06 2679.22,1469.36 1267,1484 2679.22,1491.17 1267,1503 2679.22,1512.98 1267,1523 2679.22,1534.79 1266,1541 2679.22,1556.6 1266,1559 2455,1576 2651,1576 2669.21,1575.98 1266,1577 1285,1577 1303,1577 1322,1577 1341.69,1577.22 1363.5,1577.22 1385.31,1577.22 1407.12,1577.22 1428.93,1577.22 1450.75,1577.22 1472.56,1577.22 1494.37,1577.22 1516.18,1577.22 1537.99,1577.22 1559.8,1577.22 1581.61,1577.22 1603.42,1577.22 1625.23,1577.22 1647.04,1577.22 1668.86,1577.22 1690.67,1577.22 1712.48,1577.22 1734.29,1577.22 1756.1,1577.22 1777.91,1577.22 1799.72,1577.22 1821.53,1577.22 1843.34,1577.22 1865.15,1577.22 1886.97,1577.22 1908.78,1577.22 1930.59,1577.22 1953,1577 1974.21,1577.22 1996.02,1577.22 2017.83,1577.22 2039.64,1577.22 2061.45,1577.22 2083.26,1577.22 2105.08,1577.22 2126.89,1577.22 2148.7,1577.22 2170.51,1577.22 2192.32,1577.22 2214.13,1577.22 2235.94,1577.22 2257.75,1577.22 2279.56,1577.22 2301.37,1577.22 2323.19,1577.22 2345,1577.22 2366.81,1577.22 2388.62,1577.22 2410.43,1577.22 2432.24,1577.22 2475.86,1577.22 2497.67,1577.22 2519.48,1577.22 2541.3,1577.22 2563.11,1577.22 2584.92,1577.22 2606.73,1577.22 2628.54,1577.22
  other v2: 2208,1048 1050,1050 1100,1050 1150,1050 1200,1050 1250,1050 1300,1050 1350,1050 1600,1050 2450,1050 1075,1100 1225,1100 1275,1100 1325,1100 1050,1150 1100,1150 1150,1150 1200,1150 1250,1150 1800,1150 1075,1200 1125,1200 1175,1200 1225,1200 1825,1200 2207.66,1229.49 2249,1229.49 2354,1235 1476,1240 1516,1240 1556,1240 1050,1250 2178.13,1260 2207.66,1260 2249,1260 2278.31,1259.96 1476,1280 1516,1280 1556,1280 2016,1290 2207.66,1290.51 2249,1290.51 1175,1300 1225,1300 1275,1300 1476,1320 1516,1320 1556,1320 2345,1357 2365,1357 2365,1375 2346.15,1375.89 1949,1414 1967,1414 1315,1417 1967,1432 2600,1450 2650,1450 1300,1550 1350,1550 1400,1550 1750,1550 1800,1550 1850,1550 1900,1550 2050,1550 2100,1550 2450,1550 2500,1550 2550,1550 2600,1550 2650,1550
NetAE100_1: AE100.1 C3.1 | length 143.6
  Top Layer w10: C3.1 AE100.1@1239.61,1250.28
NetAE100_3: AE100.3 C114.2 | length 45.3
  Top Layer w10: AE100.3 C114.2
NetC2_2: C2.2 U1.B3 | length 78.5
  Top Layer w10: U1.B3 2473.11,1429.96 2484.18,1441.04 2484.18,1441.94 2484.49,1442.24 2484.49,1457.05 2484.11,1457.43 2484.11,1484.09 C2.2@2478.31,1489.89
NetC3_2: C3.2 L1.1 L2.2 | length 56.7
  Top Layer w10: L1.1 1096,1342.28 C3.2
NetC110_2: C110.2 U100.28 | length 115.2
  Top Layer w10: U100.28 1614.41,1271.06 1641.78,1271.06 C110.2
NetC111_2: C111.2 J2.4 U100.29 | length 277.9
  Top Layer w10: U100.29 1614.41,1290.75 1634.83,1290.75 1675,1330.92 v2(1675,1409) C111.2
  Bottom Layer w10: J2.4 1621,1448.19 1659.09,1410.1 1673.9,1410.1 v2(1675,1409)
NetC112_2: C112.2 C113.2 L101.1 NP100.1 U100.27 | length 260.1
  Top Layer w10: U100.27 1648.47,1250.47 1672,1274 L101.1 1741,1294 C113.2 1741.1,1332.39 1779,1332.39 1779.1,1332.28 NP100.1
NetC114_1: C114.1 U100.14 | length 64
  Top Layer w10: C114.1 1418.5,1250 U100.14
NetC202_1: C202.1 C205.1 C206.2 C207.1 C208.2 C209.2 C210.2 C211.2 U200.2 | length 515.4
  Top Layer w20: C205.1 C202.1 2203.9,1480.9 2225,1502 2291,1502 v2(2318.7,1474.3) 2318.7,1443.88 C207.1 ; C209.2 2463.75,1224.32 2463.75,1184.32 C210.2 C211.2
  Bottom Layer w20: v2(2318.7,1474.3) 2318.7,1339.3 2347,1311 v2(2360,1311)
NetC202_2: C202.2 U200.5 | length 95.9
  Top Layer w10: C202.2@2203.9,1406.73 2209.1,1401.54 2209.1,1380.02 2237.95,1351.17 U200.5
NetC203_2: C203.2 C204.2 C215.2 R200.1 R201.2 U200.18 | length 911.7
  Top Layer w10: R201.2 2070.9,1398.76 2070.9,1378.76 2044,1351.85 2044,1054.66 2065.41,1033.25 2131.25,1033.25 v2(2151,1053) 2151.05,1053.05 2151.05,1086.7 R200.1 ; U200.18 2277.59,1194.73 2277.59,1177.91 v2(2306.11,1149.39) C203.2 C204.2 2383.3,1122.19 C215.2 C215.2@2389.11,1114.81
  Bottom Layer w10: v2(2151,1053) 2151,1090 2210.39,1149.39 v2(2306.11,1149.39)
NetC205_2: C205.2 U200.6 | length 103.8
  Top Layer w10: C205.2 2178.82,1391.53 2178.82,1385.02 2217.99,1345.85 2217.99,1325.2 U200.6
NetC206_1: C206.1 C208.1 C209.1 J200.1
NetC207_2: C207.2 U200.3 | length 92.4
  Top Layer w10: U200.3@2277.59,1331.74 2277.59,1340.26 2320.9,1383.57 C207.2
NetC210_1: C210.1 C211.1 C212.1 C213.1 C214.1 J200.2 U200.19 | length 333.5
  Top Layer w10: C213.1 C214.1 C212.1 ; 2564.39,1084.96 J200.2
  Top Layer w20: v2(2267,1048) 2268.11,1049.11 C212.1 C212.1@2270.31,1084.55
  Bottom Layer w20: v2(2267,1048) 2281.25,1062.25 2281.25,1077.25 v2(2372,1168)
NetC212_2: C212.2 U200.17 | length 77.2
  Top Layer w10: U200.17 2257.63,1164.03 2268.11,1153.56 C212.2
NetC213_2: C213.2 U200.15 | length 84.5
  Top Layer w10: C213.2 2197.31,1129.39 2197.31,1147.81 2212.56,1163.05 2212.56,1163.24 2217.99,1168.67 2217.99,1194.73 U200.15
NetC214_2: C214.2 U200.16 | length 76.5
  Top Layer w10: C214.2 2229.11,1154.51 2237.95,1163.35 U200.16
NetD200_1: D200.1 U200.7 | length 123
  Top Layer w10: D200.1 2139.03,1391.54 2139.03,1388.71 2160.78,1366.96 2171.6,1366.96 2198.3,1340.26 2198.3,1325.2 U200.7
NetD200_2: D200.2 R201.1 | length 55.9
  Top Layer w10: R201.1 2084.28,1447.57 2096.22,1447.57 D200.2
NetJ1_1: J1.1 R1.1 | length 123.1
  Top Layer w10: J1.1@1452.85,1524.2 1518,1524.2 R1.1
NetJ2_2: J2.2 U100.6 | length 455.2
  Top Layer w10: U100.6 1486.47,1473.35 1492.29,1479.16 1492.29,1492.29 v2(1493.39,1493.39)
  Bottom Layer w10: v2(1493.39,1493.39) 1494.49,1494.49 1494.49,1503.77 1542.72,1552 1699,1552 1721,1530 J2.2
NetJ2_3: J2.3 U100.5 | length 400.1
  Top Layer w10: U100.5 1506.16,1467.75 1513.47,1475.07 v2(1513.47,1476.63)
  Bottom Layer w10: v2(1513.47,1476.63) 1514.57,1477.73 1514.57,1498.57 1550.13,1534.13 1686.22,1534.13 1696.75,1523.59 1696.75,1497.56 1671,1471.81 J2.3
NetJ3_1: J3.1 U100.4 | length 131.3
  Top Layer w10: U100.4 1525.84,1422.29 1530,1426.44 v2(1530,1428)
  Bottom Layer w10: J3.1 1467,1456.07 1482.19,1440.88 1516.64,1440.88 v2@1529.53,1428
NetJ3_2: J3.2 U100.7 | length 104.4
  Top Layer w10: v2(1444,1423) 1465.88,1401.12 1465.88,1378.41 U100.7
  Bottom Layer w10: J3.2 1417,1449.59 1443.59,1423 v2(1444,1423)
NetJ602_2: J602.2 NP200.2 | length 138.1
  Top Layer w10: NP200.2 2553.11,1345.96 J602.2
NetL1_2: L1.2 RF1.1 | length 39.3
  Top Layer w10: RF1.1 1095.87,1414.39 L1.2
NetL100_1: L100.1 L101.2 | length 99.3
  Top Layer w10: 1756.2,1216 1784.8,1216 1795.49,1226.69 1795.49,1254 L101.2@1815.49,1274
NetL100_2: L100.2 U100.25 | length 121.5
  Top Layer w10: U100.25@1623.59,1211.1 U100.25 1614.41,1212.01 1702.29,1212.01 L100.2 ; 1693.7,1223.2 1700.08,1223.2 L100.2@1707.28,1216
NetNP200_1: NP200.1 R205.2 U200.13 | length 648.9
  Top Layer w10: R205.2 2081.31,1255.47 2088.49,1255.47 2108,1235.97 2108,1190.86 2128.54,1170.32 2139,1170.32 ; v2(2142,1152) 2140.9,1153.1 2140.9,1168.42 2139,1170.32 ; U200.13 2178.62,1194.73 2178.62,1179.67 2169.27,1170.32 2139,1170.32 ; v2(2431,1334) 2451.33,1334 2456.08,1338.76 2457.19,1338.76 NP200.1
  Bottom Layer w10: v2(2142,1152) 2163,1173 2335,1173 2431,1269 v2(2431,1334)
NetR2_2: R2.2 U1.B1 | length 71.1
  Top Layer w10: R2.2@2361.11,1406.25 2371.46,1416.6 2378.64,1416.6 2392.01,1429.96 U1.B1
NetR200_2: R200.2 R202.2 R203.2 U200.14 | length 170.5
  Top Layer w10: R203.2 R202.2 R200.2 2165.03,1136.11 2165.03,1140.8 2198.3,1174.08 2198.3,1194.73 U200.14
NetR203_1: R203.1 U200.12 | length 231.6
  Top Layer w10: R203.1 2073.55,1086.31 2073.55,1054.45 v2(2074,1054) ; v2(2131,1199) 2132.56,1199 2136.55,1195 U200.12
  Bottom Layer w10: v2(2074,1054) 2074,1142 v2(2131,1199)
NetR204_2: R204.2 U200.10 | length 75.2
  Top Layer w5: R204.2 2088.15,1289.49 U200.10
NetR400_1: R400.1 TP1.1 U100.31 U400.13 | length 445.2
  Top Layer w10: U100.31 1614.41,1330.12 1634.83,1330.12 1648.71,1344 v2(1649,1344) ; R400.1@1884,1088.94 1871.08,1101.87 1871.08,1108.92 1849,1131 1849,1158.14 v2(1853.49,1162.63) 1857.98,1167.12 1882.87,1167.12 U400.13
  Bottom Layer w10: v2(1649,1344) 1820,1173 1830.18,1162.82 1853.3,1162.82 v2(1853.49,1162.63)
NetR401_1: R401.1 TP2.1 U1.A3 U100.8 U400.2 | length 1590.9
  Top Layer w10: v2(1423,1391) 1424.56,1391 1427.06,1388.5 1446.2,1388.5 1447.1,1387.59 U100.8 ; R401.1 1961,1115.9 1951.61,1125.29 1951.61,1149.73 1968.99,1167.12 1977.35,1167.12 U400.2 v2(2021,1169) ; v2(2451,1525) 2451,1491.94 2453.31,1489.63 2453.31,1472.42 2461.79,1463.94 U1.A3
  Bottom Layer w10: v2(1423,1391) 1446,1368 1654.34,1368 1689.34,1333 1853,1333 1887,1299 1887,1213.36 v2(1949.93,1150.43) ; v2(2021,1169) 2053.25,1201.25 2053.25,1228.25 2190,1365 2190,1471.44 2216.56,1498 2424,1498 v2(2451,1525) v2@2452.56,1525
NetR402_1: R402.1 TP3.1 U1.A2 U100.22 U400.3 | length 1345.1
  Top Layer w10: U100.22 1546.43,1181.59 1546.43,1161.17 1559.45,1148.15 1606.3,1148.15 1613.44,1141 v2(1615,1141) ; R402.1 v2(1923,1134.22) 1923,1179 1944.5,1200.5 U400.3 1979.5,1200.25 2020.75,1200.25 v2(2021,1200) ; v2(2425,1535) 2425,1492 2435.44,1481.56 2435.44,1465.02 2442.11,1458.35 U1.A2
  Bottom Layer w10: v2(1615,1141) 1644.66,1141 1686.41,1099.25 1888.04,1099.25 v2(1923,1134.22) ; v2(2021,1200) 2021,1201.56 2035.38,1215.93 2035.38,1235.66 2172,1372.28 2172,1478.72 2209.53,1516.25 2384,1516.25 2406.25,1516.25 v2(2425,1535)
NetTP4_1: TP4.1 U1.A1 U100.1 | length 1051.3
  Top Layer w10: v2(1573,1411) 1573,1409.82 1583.99,1398.83 1583.99,1378.41 U100.1 ; v2(2332,1537) 2363.18,1505.82 2376.92,1505.82 2407,1475.75 2407,1464 2421.35,1449.65 U1.A1
  Bottom Layer w10: v2(1573,1411) 1597.55,1386.45 1702.55,1386.45 1726,1363 1840.66,1363 1852.78,1350.87 1868.63,1350.87 1878.5,1341 2026.34,1341 2131.62,1446.28 2131.62,1463.62 2205,1537 v2(2332,1537)
NetU100_16: U100.16 X101.3 | length 104.8
  Top Layer w10: X101.3 1403.33,1165.59 1418.5,1180.76 U100.16
NetU100_17: U100.17 X101.1 | length 147.5
  Top Layer w10: X101.1 1473,1085.77 1473,1129.99 1448.01,1154.99 1448.01,1181.59 U100.17
OSC_32.768_IN: C108.2 U100.20 X100.1 | length 141.5
  Top Layer w10: U100.20 1506.16,1110.13 1539.13,1110.13 1555.16,1094.11 X100.1@1555.16,1080.63
OSC_32.768_OUT: C109.2 U100.21 X100.2 | length 252.8
  Top Layer w10: U100.21 1526.75,1181.59 1526.75,1155.58 1552.05,1130.28 1582.77,1130.28 1590.32,1122.73 1590.32,1122.41 1600.32,1112.4 1637.56,1112.4 1654.21,1095.75 X100.2 1669.93,1095.72 C109.2
VBAT: C1.2 J602.3 U1.C3 | length 12.6
  Top Layer w10: C1.2@2506.71,1410.28 C1.2@2515.61,1419.17
  other v2: 2477,1381 2495,1381 2513,1381
VSYS: C200.2 C201.2 C300.2 C304.2 C400.2 C401.2 U1.C2 U2.3 U2.4 U200.4 U400.9 U400.10 | length 235.6
  Top Layer w10: U400.10 1885.01,1263.75 1926.75,1263.75 v2(1927,1264) ; U400.9 v2(1924,1295) ; C400.2 1960.22,1363.69 1977.31,1363.69 v2(1978,1363) ; C401.2 1998,1469.49 2014.51,1486 C304.2 ; C304.2@2009.02,1478.93 C304.2 ; C300.2 2038,1465.66 2017.66,1486 C304.2
  other v2: 2264,1359 2424,1359 2406,1360 2438,1375 2253,1376 2275,1376 2416,1376 1972,1503 1972,1531 2008,1531
pads on no net: RF1.2 U100.2 U100.3 U100.9 U100.10 U100.12 U100.18 U100.19 U100.23 U100.30 U200.8 U400.1 U400.5 U400.6 U400.7 U400.8 U400.14

## Polygon pours and split planes (outlines as drawn)
GND on Top Layer "GND_L01_P013" (solid, pour order 13): 2420.77,1411.92 2440.46,1431.61 2444.01,1428.06 2424.32,1408.37
GND on Top Layer "GND_L01_P010" (solid, pour order 10): 1006.88,1006 2687.91,1006 2687.91,1585 1006.88,1585
1V8 on Top Layer "1V8_L01_P009" (solid, pour order 9): 1803.59,1460.49 1910.76,1460.49 1925.19,1446.06 1924.2,1445.07 1924.2,1424.2 1918,1418 1911,1418 1848.51,1355.51 1803.59,1355.51 1803.59,1448.28
VSYS on Top Layer "VSYS_L01_P008" (solid, pour order 8): 1918.1,1478.93 1918.17,1479 1972,1479 1983.31,1467.69 2035.97,1467.69 2035.97,1531.03 2021,1546 1937,1546 1918.1,1527.1 1918.1,1478.93 1930.31,1478.93
GND on Top Layer "GND_L01_P007" (solid, pour order 7): 1921.25,1462 1938,1445.25 1938,1408 1944,1402 1977,1402 1977,1437.75 1944.87,1469.87
NetC202_1 on Top Layer "NETC202_1_L01_P002" (solid, pour order 2): 2292.28,1336.74 2409.26,1336.74 2428.83,1317.17 2476.59,1317.17 2476.59,1212.76 2409.62,1212.76 2309.26,1313.11 2292.28,1313.11
VBAT on Top Layer "VBAT_L01_P006" (solid, pour order 6): 2461.79,1415.1 2477.1,1415.1 2488.45,1426.45 2526.31,1426.45 2526.31,1377.31 2520,1371 2474,1371 2457,1388 2457,1413.11
VSYS on Top Layer "VSYS_L01_P005" (solid, pour order 5): 2437.28,1410.28 2446.93,1410.28 2446.93,1367.93 2424,1345 2392,1345 2386,1351 2386,1358.99 2418.01,1391 2428,1391 2437.28,1400.28
VSYS on Top Layer "VSYS_L01_P004" (solid, pour order 4): 2252.91,1313.11 2252.91,1349.81 2230.7,1372.02 2230.7,1418.45 2294.11,1418.45 2294.11,1372.11 2262.36,1340.36 2262.36,1313.11
NetC206_1 on Top Layer "NETC206_1_L01_P003" (solid, pour order 3): 2487.62,1317.17 2487.62,1212.76 2503.24,1212.76 2575,1141 2658,1141 2658,1227 2637,1248 2592,1248 2522.83,1317.17
NetC210_1 on Top Layer "NETC210_1_L01_P001" (solid, pour order 1): 2657.35,1129 2657.35,1053.35 2644,1040 2501,1040 2388,1153 2322.47,1153 2292.28,1183.19 2292.28,1206.82 2399.18,1206.82 2445.55,1160.45 2539.55,1160.45 2571,1129
GND on Bottom Layer "GND_L04_P011" (solid, pour order 11): 2687.91,1585 2687.91,1006.14 1834.78,1006 1006.58,1006.14 1006.89,1307.53 1006.6,1585
VBAT on Int2 (PWR) (split plane): 2672.82,1339.1 2452.1,1339.1 2452.1,1570.45 2672.82,1570.45
VSYS on Int2 (PWR) (split plane): 2441.9,1339.1 2041,1339.1 2039.05,1338.71 2037.4,1337.6 1950.89,1251.1 1917.11,1251.1 1909.1,1259.11 1909.1,1299.89 1910.6,1301.4 1910.61,1301.4 1920.85,1311.65 1941.35,1332.15 1951.6,1342.4 1952.71,1344.05 1953.1,1346 1953.1,1427 1953.1,1570.45 2441.9,1570.45
1V8 on Int2 (PWR) (split plane): 1942.9,1427 1942.9,1348.11 1934.15,1339.35 1913.65,1318.85 1903.4,1308.61 1903.4,1308.6 1900.4,1305.6 1899.29,1303.95 1898.9,1302 1898.9,1257 1899.29,1255.05 1900.4,1253.4 1911.4,1242.4 1913.05,1241.29 1915,1240.9 1953,1240.9 1954.95,1241.29 1956.6,1242.4 2043.11,1328.9 2672.82,1328.9 2672.82,1020.1 1020.1,1020.1 1020.1,1335 1256,1335 1256,1570.45 1942.9,1570.45
GND on Int1 (GND) (split plane): 2672.82,1020.1 1020.1,1020.1 1020.1,1318 1275,1318 1275,1570.45 2672.82,1570.45

## Other copper
Top Layer:
  pour cut-out: 1458.45,1126.34 1381.23,1126.34 1381.23,1041.29 1458.45,1041.29
  pour cut-out: 1256,1335 1256,1591 1000,1591 1000,1335
Bottom Layer:
  pour cut-out: 1256,1335 1256,1591 1000,1591 1000,1335
Int1 (GND) (plane layer: these items are gaps in the copper):
  pour cut-out: 1275,1318 1275,1591 1000,1591 1000,1318
Int2 (PWR) (plane layer: these items are gaps in the copper):
  pour cut-out: 1256,1335 1256,1591 1000,1591 1000,1335
  lines w10: 2225,1590 1948,1590 1948,1427 1948,1346 1937.75,1335.75 1917.25,1315.25 1907,1305 1904,1302 1904,1257 1915,1246 1953,1246 2041,1334 2466,1334 ; 2447,1590 2447,1334 2692,1334

## Silkscreen, mask and mechanical layers (free items; w line width, h text height)
Bottom Overlay:
  text "SERIAL" at 1496,1520.44 h60
  text "DEBUG" at 1735,1519.44 h60
  text "SDA" at 2400.56,1506 h60 r90
  text "+" at 2537,1490.5 h60
  text "LOW" at 2176.56,1490 h60 r90
  text "SCL" at 2451.36,1456.98 h60 r90
  text "GND" at 1384.56,1402.39 h60 r90
  text "TX" at 1437,1402.39 h60 r90
  text "RX" at 1489,1402.39 h60 r90
  text "GND" at 1587.56,1402.39 h60 r90
  text "RST" at 1639.38,1402.39 h60 r90
  text "CLK" at 1691.08,1402.39 h60 r90
  text "SWIO" at 1742.9,1402.39 h60 r90
  text "VCC" at 1793.61,1402.39 h60 r90
  text "-" at 2541.5,1292.46 h60
  text "INT" at 1766,1212 h60 r90
Top Solder:
  drawing of 5 lines, arcs and shapes, not listed
Mechanical 1:
  the board outline again, w10
Mechanical 2:
  lines w1: 1064.87,1335 1064.87,1397.99